# EAGLE board lock-board2_v3 (EAGLE 7.6.0)
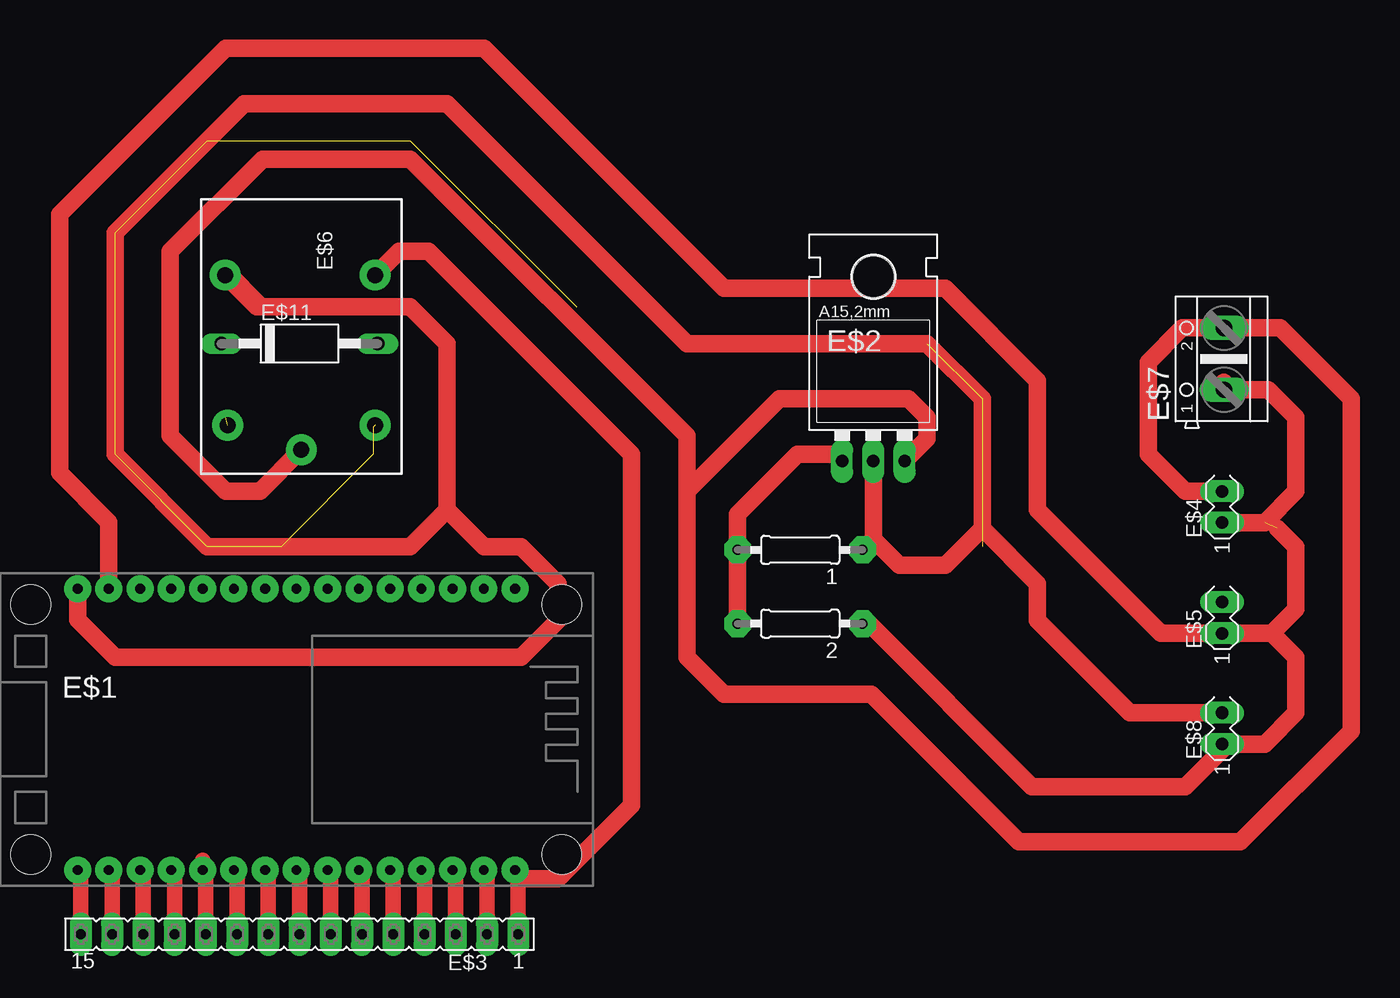
[diagram p0: board, top side]
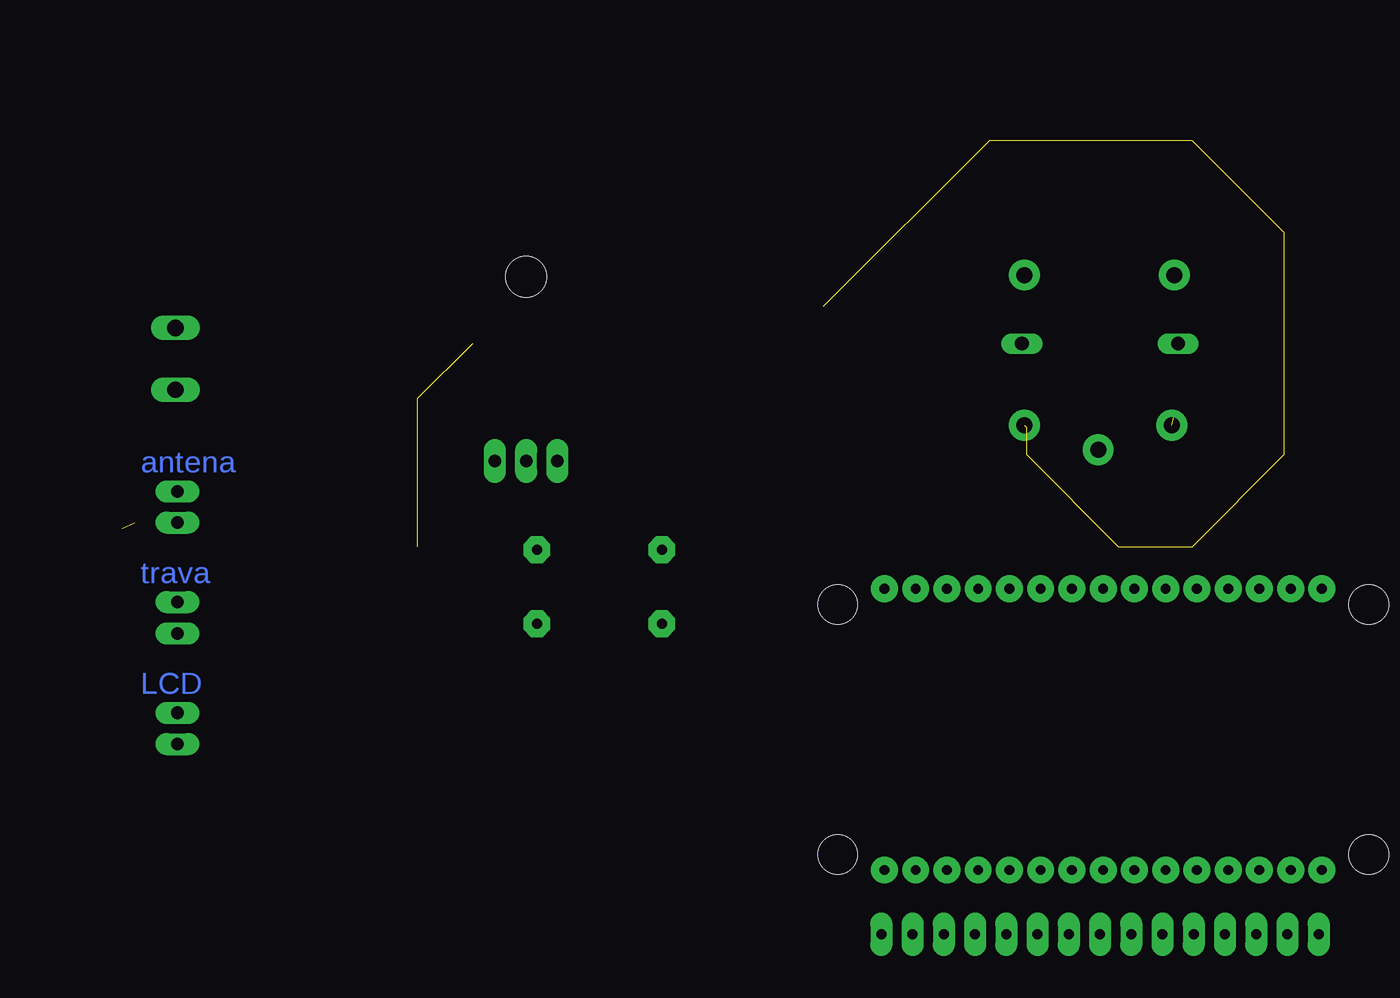
[diagram p1: board, bottom side, seen from below]

No outline drawn. Coordinates in mm, seen from the top.
Copper layers (1*16): Top 0.035mm / dielectric 1.5mm / Bottom 0.035mm
Design rules "default": minimum track width 10mil, minimum drill 24mil, track to track 8mil, track to pad 8mil, pad to pad 8mil, via to via 8mil, smd to smd 8mil, copper to edge 40mil, drill to drill 8mil, minimum pad ring 10mil, minimum via ring 8mil, stop-mask expansion 4mil, vias tented up to drill 0mil, thermal gap 10mil
Net classes: 0 default: clearance 0.205 mm

## Footprints (pad centres in the part's own frame; a part is rotated, then mirrored left to right if it is on the bottom)
0207/10 = drill 0.813 pad 2.184 octagon: 1 -5.08,0; 2 5.08,0
ESP12E_DEVKIT = drill 0.8 pad 2.184: 3V3@0 -11.43,-7.62; 3V3@1 11.43,5.08; 3V3@2 11.43,-17.78; AD0 -11.43,17.78; CLK -11.43,-2.54; CMD -11.43,2.54; D0 11.43,17.78; D1 11.43,15.24; D2 11.43,12.7; D3 11.43,10.16; D4 11.43,7.62; D5 11.43,0; D6 11.43,-2.54; D7 11.43,-5.08; D8 11.43,-7.62; EN -11.43,-10.16; GND@0 -11.43,-5.08; GND@1 -11.43,-15.24; GND@2 11.43,2.54; GND@3 11.43,-15.24; RST -11.43,-12.7; RSV@0 -11.43,15.24; RSV@1 -11.43,12.7; RX 11.43,-10.16; SD0 -11.43,0; SD1 -11.43,5.08; SD2 -11.43,7.62; SD3 -11.43,10.16; TX 11.43,-12.7; VIN -11.43,-17.78 | hole 3.2: -10.16,21.59; 10.16,21.59; 10.16,-21.59; -10.16,-21.59
317TL = drill 1.016 pad 1.778 long: 1 -2.54,-3.81; 2 0,-3.81; 3 2.54,-3.81 | hole 3.302: 0,11.176
FE15 = drill 0.813 pad 1.778 long: 1 -17.78,0; 2 -15.24,0; 3 -12.7,0; 4 -10.16,0; 5 -7.62,0; 6 -5.08,0; 7 -2.54,0; 8 0,0; 9 2.54,0; 10 5.08,0; 11 7.62,0; 12 10.16,0; 13 12.7,0; 14 15.24,0; 15 17.78,0
MA03-1 = drill 1.016 pad 1.778 long: 1 -2.54,0; 2 0,0
ZN5 = drill 1.3 pad 2.5: 11 8.89,0; 12 -5.31,-6.2; 14 -5.31,6; A1 6.89,6; A2 6.89,-6
AK500/2 = drill 1.321 long: 1 -2.515,0; 2 2.515,0
P1-12E = drill 1.118 long: A 6.35,0; C -6.35,0

## Placement (x,y rotation side)
1  [0207/10]  115.7,64.24 180 top
2  [0207/10]  115.7,58.24 180 top
E$1  [ESP12E_DEVKIT]  74.74,49.65 270 top
E$2  [317TL]  121.65,75.26 0 top
E$3  [FE15]  75,33 180 top
E$4  [MA03-1]  150,69 90 top
E$5  [MA03-1]  150,60 90 top
E$6  [ZN5]  75.15,81.26 270 top
E$7  [AK500/2]  150.15,79.76 90 top
E$8  [MA03-1]  150,51 90 top
E$11  [P1-12E]  75,81 0 top

## Library data of the parts
1 2 = eagle-ltspice
E$1 = ESP12E_DEVKIT
E$2 = v-reg
E$3 = con-lsta
E$4 E$5 E$8 = con-lstb
E$6 = relay
E$7 = con-ptr500
E$11 = diode

## Nets
S$1: E$1.D0 E$3.1 E$6.14
S$3: 2.1 E$1.GND@1 E$4.1 E$5.1 E$7.1 E$8.1
S$4: E$1.D8 E$3.11
S$5: E$2.3 E$4.2 E$6.11 E$7.2
S$6: E$6.A1
S$7: 1.1 E$1.VIN E$2.2 E$6.12 E$8.2
S$8: 1.2 2.2 E$2.1
S$11: E$1.D1 E$3.2
S$12: E$1.D2 E$3.3
S$13: E$1.D3 E$3.4
S$14: E$1.D4 E$3.5
S$15: E$1.3V3@1 E$3.6
S$16: E$1.GND@2 E$3.7
S$17: E$1.D5 E$3.8
S$18: E$1.D6 E$3.9
S$19: E$1.D7 E$3.10
S$20: E$1.RX E$3.12
S$21: E$1.TX E$3.13
S$24: E$1.3V3@2 E$3.15
S$25: E$1.GND@3 E$3.14
S$27: E$6.A2

## Tracks (layer width: path | path; a pad name or v marks a point on that pad's centre or on a via)
S$1
  Top 1.27: E$3.1 92.78,37.5 92.78,37.96 E$1.D0
  Top 1.422: E$6.14 83.08,88.5 85.5,88.5 102,72 102,43.5 96,37.5 92.78,37.5
S$2  (2 unrouted)
S$3  (1 unrouted)
  Top 1.422: 150.15,77.85 E$7.1 153.75,77.25 156,75 156,69 153.46,66.46 E$4.1 | 154.5,66 156,64.5 156,59.42 154.04,57.46 | 154.04,57.46 E$5.1 145.04,57.46 135,67.5 135,78 127.5,85.5 109.5,85.5 90,105 69,105 55.5,91.5 55.5,70.5 59.5,66.5 E$1.GND@1 | 154.04,57.46 156,55.5 156,51 153.46,48.46 E$8.1 150,48 147,45 134.54,45 121.04,58.5 2.1
S$4
  Top 1.27: 67.12,39.03 E$1.D8 67.38,37.96 E$3.11
S$5
  Top 1.422: E$2.3 126,73.26 126,75 124.5,76.5 114,76.5 106.5,69 | 106.5,69 106.5,73.5 84,96 72,96 64.5,88.5 64.5,73.5 69,69 71.78,69 E$6.11 | 106.5,69 106.5,55.5 109.5,52.5 121.5,52.5 133.5,40.5 151.5,40.5 160.5,49.5 160.5,76.5 154.72,82.28 E$7.2 146.78,82.28 144,79.5 144,72 147,69 E$4.2
S$6  (9 unrouted)
S$7
  Top 1.422: E$1.VIN 56.96,58.54 60,55.5 93,55.5 96,58.5 96,61.5 93,64.5 90,64.5 87,67.5 | 71.9,84 68.95,86.95 E$6.12 71.52,84 71.9,84 | 71.9,84 84,84 87,81 87,67.5 | E$2.2 121.65,65.11 | 121.65,65.11 121.27,64.73 | 121.5,64.5 121.27,64.73 | 121.27,64.73 1.1 | 87,67.5 84,64.5 67.5,64.5 60,72 60,90 70.5,100.5 87,100.5 106.5,81 126,81 130.5,76.5 130.5,66 | E$8.2 142.5,51 135,58.5 135,61.5 130.5,66 | 121.65,65.11 123.76,63 127.5,63 130.5,66
S$8
  Top 1.422: E$2.1 118.56,72 115.5,72 110.62,67.12 1.2 2.2
S$11
  Top 1.27: E$3.2 90.24,37.96 E$1.D1
S$12
  Top 1.27: E$3.3 87.7,37.96 E$1.D2
S$13
  Top 1.27: E$3.4 85.16,37.96 E$1.D3
S$14
  Top 1.27: E$3.5 82.62,37.96 E$1.D4
S$15
  Top 1.27: E$3.6 80.08,37.96 E$1.3V3@1
S$16
  Top 1.27: E$3.7 77.54,37.96 E$1.GND@2
S$17
  Top 1.27: E$3.8 75,37.96 E$1.D5
S$18
  Top 1.27: E$3.9 72.46,37.96 E$1.D6
S$19
  Top 1.27: E$3.10 69.92,37.96 E$1.D7
S$20
  Top 1.27: E$3.12 64.84,37.96 E$1.RX
S$21
  Top 1.27: E$3.13 62.3,37.96 E$1.TX
S$24
  Top 1.27: E$3.15 57.22,37.96 E$1.3V3@2
S$25
  Top 1.27: E$3.14 59.76,37.96 E$1.GND@3
S$27  (1 unrouted)

## Text on the board
Bottom: antena | trava | LCD